# Altium PCB Main.PcbDoc
Units mil, origin at the board's own origin, x right, y up, seen from the top; angles counter-clockwise.
Board outline 6000 x 4000 mil, 2 copper layers (Top Layer, Bottom Layer); 78 components, 93 nets, 345 pads, 12 vias.
Unrouted connection lines stored in the file: 232.
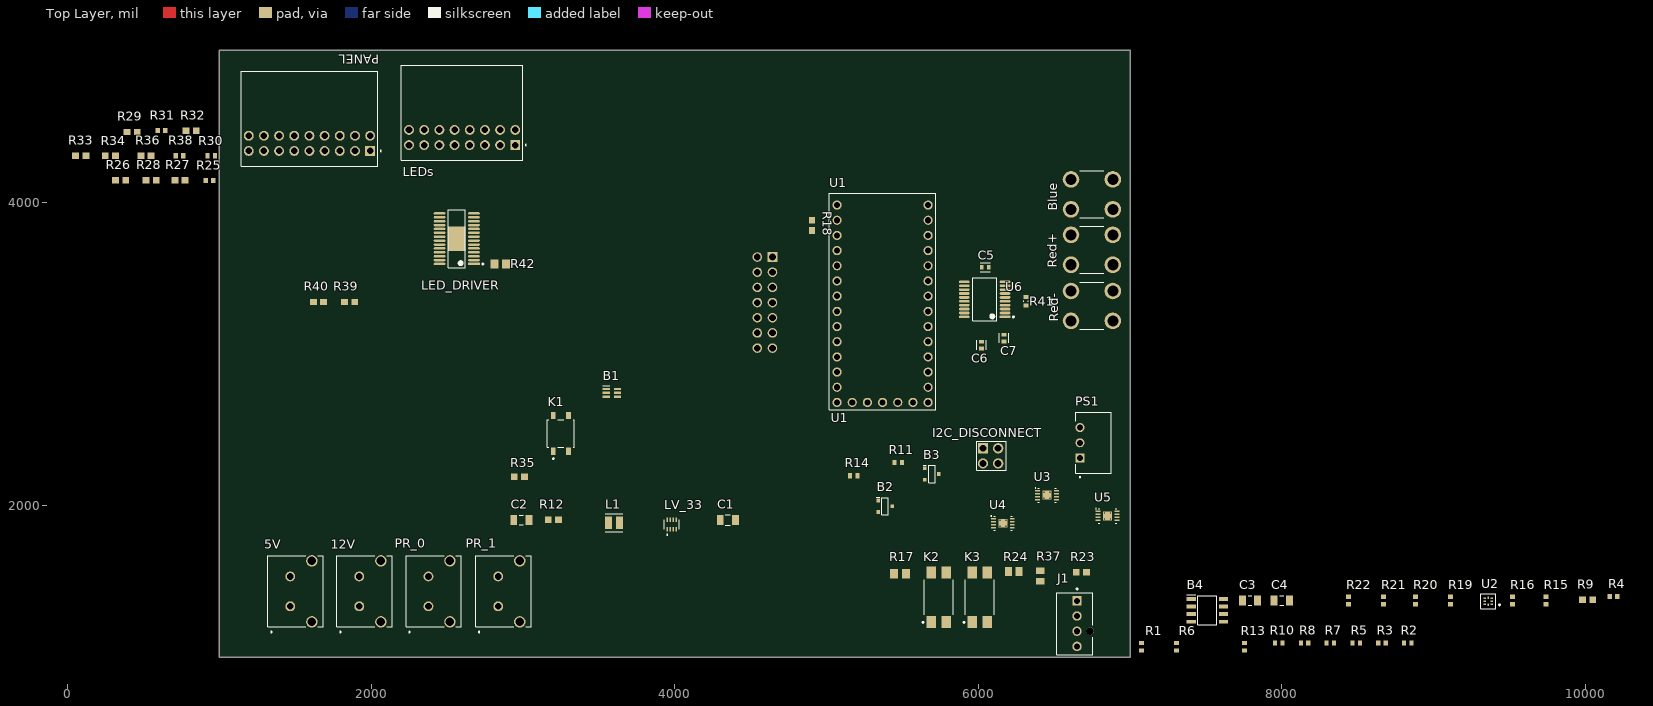
[diagram p0: Top Layer view]
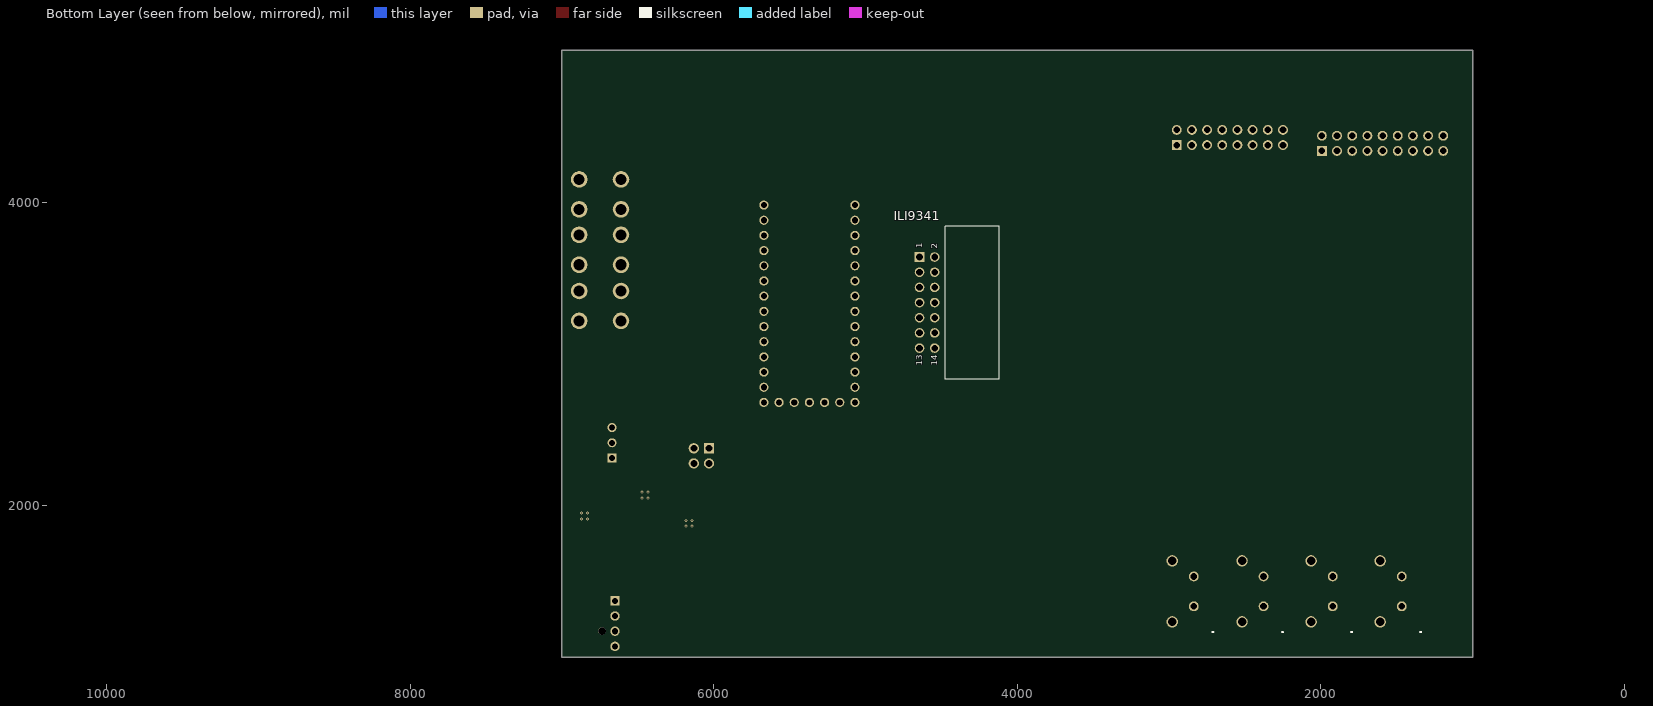
[diagram p1: Bottom Layer view, seen from below]

## Layer stack, top to bottom
Top Solder: solder mask 0.4, Solder Resist, Dk 3.5
Top Layer: signal copper 1.4
Dielectric 1: dielectric 12.6, FR-4, Dk 4.8
Bottom Layer: signal copper 1.4
Bottom Solder: solder mask 0.4, Solder Resist, Dk 3.5

## Board outline
1000,1000 7000,1000 7000,5000 1000,5000

## Design rules (kind name [scope] priority, off if disabled: settings)
BoardOutlineClearance mdCopperDimension [All] p1: gap=10 ignorepadtopadclearanceinfootprint=FALSE except(0: Arc-SplitContinuation Track-SplitContinuation SMDPad-SplitContinuation THPad-SplitContinuation Via-SplitContinuation Fill-SplitContinuation Poly-SplitContinuation Region-SplitContinuation Text-SplitContinuation; 40: Poly-OutlineEdge Poly-CavityEdge Poly-CutoutEdge Poly-SplitBarrior)
Clearance Minimum [InNamedUnion('BMI088') OR InNamedUnion('ICS')] p1: gap=5 ignorepadtopadclearanceinfootprint=FALSE
Clearance Typical [All] p2: gap=14 ignorepadtopadclearanceinfootprint=TRUE except(8: Arc-SMDPad Track-SMDPad SMDPad-SMDPad; 10: Arc-Text Arc-Hole Track-Text Track-Hole SMDPad-Text SMDPad-Hole THPad-Text THPad-Hole Via-Text Via-Hole Fill-Text Fill-Hole Poly-Text Poly-Hole Region-Text Region-Hole Text-Text Text-Hole; 12: Arc-THPad Arc-Via Track-THPad Track-Via SMDPad-THPad SMDPad-Via THPad-THPad THPad-Via)
DiffPairsRouting PumpDiffPairsRouting [InDifferentialPair ('Pump_I2C')] p1: maxlimit=50 minlimit=8 mostfreqgap=16 toplayer_minwidth=8 toplayer_maxwidth=16 toplayer_prefwidth=8 bottomlayer_minwidth=8 bottomlayer_maxwidth=16 bottomlayer_prefwidth=8 maxuncoupledlength=72
DiffPairsRouting BMI088_I2C_DiffPairsRouting [InDifferentialPair ('BMI088_I2C')] p2: maxlimit=50 minlimit=8 mostfreqgap=16 toplayer_minwidth=8 toplayer_maxwidth=16 toplayer_prefwidth=8 bottomlayer_minwidth=8 bottomlayer_maxwidth=16 bottomlayer_prefwidth=8 maxuncoupledlength=72
DiffPairsRouting [All] p3: maxlimit=10 minlimit=10 mostfreqgap=10 toplayer_minwidth=15 toplayer_maxwidth=15 toplayer_prefwidth=15 bottomlayer_minwidth=15 bottomlayer_maxwidth=15 bottomlayer_prefwidth=15 maxuncoupledlength=500
Height [All] p1: minheight=0 maxheight=2500 prefheight=500
HoleSize [All] p1: absolutevalues=TRUE maxlimit=100000 minlimit=10 maxpercent=80.000 minpercent=20.000
HoleToHoleClearance mdDrill [All] p1: gap=10 allowstackedmicrovias=FALSE
MatchedLengths PumpMatchedLengths [InDifferentialPair ('Pump_I2C')] p1: tolerance=72 checknetsindiffpair=TRUE checkdiffpairvsdiffpair=FALSE checkxsignals=FALSE checkothers=FALSE
MatchedLengths BMI088_I2C_MatchedLengths [InDifferentialPair ('BMI088_I2C')] p2: tolerance=16 checknetsindiffpair=FALSE checkdiffpairvsdiffpair=TRUE checkxsignals=TRUE checkothers=TRUE
MinimumAnnularRing MinimumAnnularRing_Component [IsPadHoleValid = True] p1: minimumring=7
MinimumAnnularRing [All] p2: minimumring=5
MinimumSolderMaskSliver [All] p1 off: minsoldermaskwidth=10
PasteMaskExpansion mlMinCreamFrame [All] p1: expansion=6
PlaneClearance [All] p1: clearance=12
PlaneConnect [All] p1: planeconnectstyle=Direct reliefexpansion=20 reliefentries=4 reliefconductorwidth=10 reliefairgap=10
PolygonConnect PolygonConnect_For_PolygonThermal_ON_Width200000_Gap100000 [InPolygonClass('PolygonThermal_ON_Width200000_Gap100000') vs Not IsVia] p1: connectstyle=Relief reliefconductorwidth=20 reliefentries=4 polygonreliefangle="90 Angle" airgapwidth=10
PolygonConnect PolygonConnect_For_PolygonThermal_ON_Width240000_Gap100000 [InPolygonClass('PolygonThermal_ON_Width240000_Gap100000') vs Not IsVia] p2: connectstyle=Relief reliefconductorwidth=24 reliefentries=4 polygonreliefangle="90 Angle" airgapwidth=10
PolygonConnect ThermalVias [IsVia] p3: connectstyle=Direct reliefconductorwidth=10 reliefentries=4 polygonreliefangle="90 Angle" airgapwidth=10
PolygonConnect [All] p4: connectstyle=Direct reliefconductorwidth=10 reliefentries=4 polygonreliefangle="90 Angle" airgapwidth=10
RoutingVias [All] p1: holewidth=16 width=32 viastyle="Through Hole" minholewidth=8 minwidth=18 maxholewidth=96 maxwidth=128
SilkToSilkClearance [All] p1: silktosilkclearance=5
SilkToSolderMaskClearance [IsPad] p1: minsilkscreentomaskgap=4 clearancetoexposedcopper=TRUE
SolderMaskExpansion mlMinStopFrame [All] p1: expansion=7 istentingtop=FALSE
UnRoutedNet [All] p1: checkbadconnections=TRUE
Width [All] p1: maxlimit=105 minlimit=8 preferedwidth=16 minimp=50.000000 maximp=50.000000 favimp=50.000000
19 further rules are at their usual default settings.

## Classes and differential pairs
component class Main: 5V 12V B1 B2 B3 B4 Blue C1 C2 C6 C7 I2C_DISCONNECT ILI9341 J1 K1 K2 K3 L1 LED_DRIVER LEDs LV_33 PANEL PR_0 PR_1 PS1 R1 R2 R3 R4 R5 R6 R7 R8 R9 R10 R11 R12 R13 R14 R15 R16 R17 R18 R19 R20 R21 R22 R23 R24 R25 R26 R27 R28 R29 R30 R31 R32 R33 R34 R35 R36 R37 R38 R39 R41 R42 Red+ Red- U1 U2 U3 U4 U5

## Components (designator, comment, footprint, x,y, rotation, side; value= is the part's Value field where it differs from the comment)
5V "2-1376382-3" CONN_1376382-1_TYCO 1467.51,1336.65 r90 top
12V "1-1376382-2" CONN_1376382-1_TYCO 1922.51,1336.65 r90 top
B1 "74AUP1G11GW,125" SOT65P210X110-6N 3586.54,2742.88 r0 top
B2 "SSM3K357R,LF" SOTFL95P240X88-3N 5386.82,1996.03 r0 top
B3 "SSM3K357R,LF" SOTFL95P240X88-3N 5694.26,2208 r0 top
B4 "ADUM121N1BRZ" SOIC127P600X175-8N 7510,1310 r0 top
Blue "Blue Connector" 8191 6887.03,3951.95 r90 top
C1 "47uF" FP-CL31-IPC_C 4350.43,1906.22 r0 top
C2 "22uF" FP-CL31H-0_2-IPC_C 2990.43,1906.22 r0 top
C3 "22uF" FP-CL31H-0_2-IPC_C 7790,1375 r0 top
C4 "22uF" FP-CL31H-0_2-IPC_C 8000,1375 r0 top
C5 "CL10B104JB8NNNC" FP-CL10-0_1-MFG 6046.15,3570.41 r0 top value=100nF
C6 "CL10B104JB8NNNC" FP-CL10-0_1-MFG 6022.75,3057.16 r270 top value=100nF
C7 "CL10B104JB8NNNC" FP-CL10-0_1-MFG 6168.75,3103.69 r270 top value=100nF
I2C_DISCONNECT "68602-104HLF" HDRV4W67P254_2X2_508X483X858P 6031.43,2277.79 r0 top
ILI9341 "61201421721" 61201421721 4297.88,3337.77 r90 bottom
J1 "47053-1000" FP-47053-1000-MFG 6636.07,1222.64 r90 top
K1 "AQY280SX" FP-AQY210SX-MFG 3250.34,2476.32 r90 top
K2 "AQY212EHA" PNSC-DIP4(SMT)_V 5739.5,1396.21 r90 top
K3 "AQY212EHA" PNSC-DIP4(SMT)_V 6009.5,1396.21 r90 top
L1 "DFE252012P-1R0M=P2" FP-DFE252012C-IPC_C 3600.43,1886.22 r0 top value=1µH
LED_DRIVER "PCA9955BTWJ" FP-SOT1172-3-IPC_A 2564.51,3758.59 r180 top
LEDs "76383-308LF" AMPHENOL_91687-306LF#1 2599.94,4425.24 r180 top
LV_33 "TPS631000DRLR" TPS631000DRLR_TEX 3980.43,1876.22 r90 top
PANEL "76383-309LF" AMPHENOL_91687-306LF#2 1594.11,4386.55 r180 top
PR_0 "1376382-1" CONN_1376382-1_TYCO 2377.51,1336.65 r90 top
PR_1 "1376382-1" CONN_1376382-1_TYCO 2837.51,1336.65 r90 top
PS1 "PXO7805-500-S" CONV_PXO7805-500-S 6670.22,2314.07 r90 top
R1 "ERJ-3EKF3000V" RESC1608X55X30LL15T15 7075,1070 r90 top value=300
R2 "ERJ-3EKF1001V" RESC1608X55X30LL15T15 8830,1095 r0 top value=1k
R3 "ERJ-3EKF1001V" RESC1608X55X30LL15T15 8660,1095 r0 top value=1k
R4 "ERJ-3EKF1001V" RESC1608X55X30LL15T15 10185,1400 r0 top value=1k
R5 "ERJ-3EKF1001V" RESC1608X55X30LL15T15 8490,1095 r0 top value=1k
R6 "ERJ-3EKF1000V" RESC1608X55X30LL15T15 7305,1070 r90 top value=100
R7 "ERJ-3EKF1001V" RESC1608X55X30LL15T15 8320,1095 r0 top value=1k
R8 "ERJ-3EKF1001V" RESC1608X55X30LL15T15 8150,1095 r0 top value=1k
R9 "10k" RESC1609X55X30ML15T15 10015,1380 r0 top
R10 "ERJ-3EKF1001V" RESC1608X55X30LL15T15 7980,1095 r0 top value=1k
R11 "ERJ-3EKF1601V" RESC1608X55X30LL15T15 5472.58,2284.05 r0 top value=1.6k
R12 "10k" RESC1609X55X30ML15T15 3200.43,1906.22 r0 top
R13 "ERJ-3EKF1001V" RESC1608X55X30LL15T15 7755,1070 r90 top value=1k
R14 "ERJ-3EKF1601V" RESC1608X55X30LL15T15 5179.7,2196.67 r0 top value=1.6k
R15 "ERJ-3EKF1001V" RESC1608X55X30LL15T15 9740,1375 r90 top value=1k
R16 "ERJ-3EKF1001V" RESC1608X55X30LL15T15 9520,1375 r90 top value=1k
R17 "2K" RESC2013X70X40ML20T20 5484.5,1551.21 r0 top
R18 "10k" RESC1609X55X30ML15T15 4904.16,3846.54 r270 top
R19 "ERJ-3EKF1001V" RESC1608X55X30LL15T15 9110,1375 r90 top value=1k
R20 "ERJ-3EKF1001V" RESC1608X55X30LL15T15 8880,1375 r90 top value=1k
R21 "ERJ-3EKF1001V" RESC1608X55X30LL15T15 8670,1375 r90 top value=1k
R22 "ERJ-3EKF1001V" RESC1608X55X30LL15T15 8440,1375 r90 top value=1k
R23 "10k" RESC1609X55X30ML15T15 6679.5,1561.21 r0 top
R24 "ERJ-6ENF1500V" RESC2013X70X40NL20T20 6234.5,1566.21 r0 top value=150
R25 "ERJ-3EKF1001V" RESC1608X55X30LL15T15 935.59,4142.99 r0 top value=1k
R26 "10k" RESC1609X55X30ML15T15 350.59,4142.99 r0 top
R27 "10k" RESC1609X55X30ML15T15 740.59,4142.99 r0 top
R28 "10k" RESC1609X55X30ML15T15 550.96,4142.99 r0 top
R29 "10k" RESC1609X55X30ML15T15 426.43,4462.11 r0 top
R30 "ERJ-3EKF1001V" RESC1608X55X30LL15T15 947.5,4304.95 r0 top value=1k
R31 "ERJ-3EKF1001V" RESC1608X55X30LL15T15 619.54,4470.29 r0 top value=1k
R32 "10k" RESC1609X55X30ML15T15 814.54,4470.29 r0 top
R33 "10k" RESC1609X55X30ML15T15 87.5,4304.95 r0 top
R34 "10k" RESC1609X55X30ML15T15 282.5,4304.95 r0 top
R35 "10k" RESC1609X55X30ML15T15 2977.14,2190.7 r0 top
R36 "10k" RESC1609X55X30ML15T15 517.5,4304.95 r0 top
R37 "ERJ-6ENF1500V" RESC2013X70X40NL20T20 6409.5,1536.21 r90 top value=150
R38 "ERJ-3EKF1001V" RESC1608X55X30LL15T15 737.5,4304.95 r0 top value=1k
R39 "10k" RESC1609X55X30ML15T15 1859.14,3341.45 r0 top
R40 "10k" RESC1609X55X30ML15T15 1654.14,3341.45 r0 top
R41 "ERJ-PB3B4300V" RES_ERJ-PB3B4300V 6314.74,3346.07 r90 top value=430
R42 "2K" RESC2013X70X40ML20T20 2851.29,3592.25 r180 top
Red+ "Red Connector" 8191 6887.03,3586.95 r90 top
Red- "Red Connector" 8191 6887.03,3216.95 r90 top
U1 "Teensy 4.0" MODULE_DEV-15583 5370,3330 r0 top
U2 "PCA9570GMH" FP-SOT902-2-MFG 9360,1370 r0 top
U3 "PCT2075TP,147" NXP-SOT1069-2_M 6452.8,2068.63 r0 top
U4 "PCT2075TP,147" NXP-SOT1069-2_M 6162.59,1883.85 r0 top
U5 "PCT2075TP,147" NXP-SOT1069-2_M 6851.82,1932.15 r0 top
U6 "MAX31865AAP+" FP-A20-1-IPC_B 6042.36,3358.87 r180 top

## Footprints (in the part's own frame and the unit in brackets; to place one, negate y for a bottom-side part, rotate by r counter-clockwise, add the part's x,y. Pads: shape width x height; smd on the part's side, far side on the other; paste and mask are expansions set on the pad)
8191 [mm]
  round 2.775 hole 1.85: 1(0,7.01) 1(0,0) 1(5,7.01) 1(5,0)
  silkscreen extent -1.44,1.51 6.44,5.51, body extent -1.45,-0.39 6.45,7.41, height 6.22
61201421721 [mm] "14 pins, right angled, gold plating"
  rect 1.6x1.6 hole 1.1: 1(7.62,8.805)
  round 1.6 hole 1.1: 2(7.62,6.265) 3(5.08,8.805) 4(5.08,6.265) 5(2.54,8.805) 6(2.54,6.265) 7(0,8.805) 8(0,6.265) 9(-2.54,8.805) 10(-2.54,6.265) 11(-5.08,8.805) 12(-5.08,6.265) 13(-7.62,8.805) 14(-7.62,6.265)
  silkscreen extent -12.8,-4.5 12.8,4.5, body extent -12.72,-4.42 12.72,9.13, height 9.23
AMPHENOL_91687-306LF#1 [mm]
  rect 1.65x1.65 hole 1.1: A1(-8.89,1.27)
  round 1.65 hole 1.1: A2(-6.35,1.27) A3(-3.81,1.27) A4(-1.27,1.27) A5(1.27,1.27) A6(3.81,1.27) A7(6.35,1.27) A8(8.89,1.27) B1(-8.89,-1.27) B2(-6.35,-1.27) B3(-3.81,-1.27) B4(-1.27,-1.27) B5(1.27,-1.27) B6(3.81,-1.27) B7(6.35,-1.27) B8(8.89,-1.27)
  silkscreen extent -10.77,-12.07 10.16,3.83, body extent -10.11,-12.02 10.11,1.57, height 7.87
AMPHENOL_91687-306LF#2 [mm]
  rect 1.65x1.65 hole 1.1: A1(-10.16,1.27)
  round 1.65 hole 1.1: A2(-7.62,1.27) A3(-5.08,1.27) A4(-2.54,1.27) A5(0,1.27) A6(2.54,1.27) A7(5.08,1.27) A8(7.62,1.27) A9(10.16,1.27) B1(-10.16,-1.27) B2(-7.62,-1.27) B3(-5.08,-1.27) B4(-2.54,-1.27) B5(0,-1.27) B6(2.54,-1.27) B7(5.08,-1.27) B8(7.62,-1.27) B9(10.16,-1.27)
  silkscreen extent -12.04,-12.07 11.43,3.83, body extent -11.38,-12.02 11.38,1.57, height 7.87
CONN_1376382-1_TYCO [mil]
  round 65 hole 45: 1(0,0) 2(196.85,0)
  round 75 hole 55: 3(-102.57,-142) 4(299.43,-142)
  silkscreen extent -175,-217 332,147, body extent -130,-205 327,173, height 555
CONV_PXO7805-500-S [mm]
  rect 1.508x1.508 hole 1: 1(0,0)
  round 1.508 hole 1: 2(2.54,0) 3(5.08,0)
  silkscreen extent -3.31,-5.26 7.68,0.74, body extent -2.6,-4.24 7.68,0.75, height 8.61
FP-47053-1000-MFG [mm]
  rect 1.57x1.57 hole 1.02 paste-1000 mask+0: 1(3.81,-0.38)
  round 1.57 hole 1.02 paste-1000 mask+0: 2(1.27,-0.38) 3(-1.27,-0.38) 4(-3.81,-0.38)
  round 1.25 hole 1.25 unplated paste-1000 mask+0: ""(-1.27,-2.54)
  silkscreen extent -5.2,-3.02 5.92,3.02, body extent -5.3,-3.26 5.3,3.12, height 0.25
FP-A20-1-IPC_B [mm]
  rect 1.782x0.458 smd paste+0 mask+0: 1(-3.414,2.925)
  rrect100% 1.782x0.458 smd paste+0 mask+0: 2(-3.414,2.275) 3(-3.414,1.625) 4(-3.414,0.975) 5(-3.414,0.325) 6(-3.414,-0.325) 7(-3.414,-0.975) 8(-3.414,-1.625) 9(-3.414,-2.275) 10(-3.414,-2.925) 11(3.414,-2.925) 12(3.414,-2.275) 13(3.414,-1.625) 14(3.414,-0.975) 15(3.414,-0.325) 16(3.414,0.325) 17(3.414,0.975) 18(3.414,1.625) 19(3.414,2.275) 20(3.414,2.925)
  silkscreen extent -4.93,-3.6 2.02,3.6, body extent -4.55,-3.85 4.55,3.85, height 0.25
FP-AQY210SX-MFG [mm]
  rect 1.2x0.8 smd paste+0 mask+0: 1(-3,1.27) 2(-3,-1.27) 3(3,-1.27) 4(3,1.27)
  silkscreen extent -4.37,-2.25 2.3,2.25, body extent -3.7,-2.35 3.7,2.35, height 0.25
FP-CL10-0_1-MFG [mm]
  rect 0.625x0.825 smd paste+0 mask+0: 1(-0.575,0) 2(0.575,0)
  silkscreen extent -0.8,-0.79 0.8,0.79, body extent -0.99,-0.55 0.99,0.55, height 0.25
FP-CL31-IPC_C [mil]
  rect 43.52x65.28 smd paste+0 mask+0: 1(-50.25,0) 2(50.25,0)
  silkscreen extent -17,-34 17,34, body extent -76,-38 76,38, height 10
FP-CL31H-0_2-IPC_C [mil]
  rect 45.45x67.17 smd paste+0 mask+0: 1(-50.23,0) 2(50.23,0)
  silkscreen extent -13,-31 13,31, body extent -77,-39 77,39, height 10
FP-DFE252012C-IPC_C [mil]
  rect 45.47x82.92 smd paste+0 mask+0: 1(-36.44,0) 2(36.44,0)
  silkscreen extent -59,-59 59,59, body extent -63,-47 63,47, height 10
FP-SOT902-2-MFG [mm]
  rect 0.45x0.27 smd paste-1000 mask-1000: 1(0.6,-0.5)
  rect 0.45x0.27 smd paste-1000 mask+0: 2(0.6,0) 3(0.6,0.5) 5(-0.6,0.5) 6(-0.6,0) 7(-0.6,-0.5)
  rect 0.27x0.45 smd paste-1000 mask+0: 4(0,0.6) 8(0,-0.6)
  silkscreen extent -1.28,-1.28 2.02,1.28, body extent -0.95,-0.95 0.95,0.95, height 0.25
FP-SOT1172-3-IPC_A [mm]
  rect 1.955x0.421 smd paste+0 mask+0: 1(-2.875,4.225)
  rrect100% 1.955x0.421 smd paste+0 mask+0: 2(-2.875,3.575) 3(-2.875,2.925) 4(-2.875,2.275) 5(-2.875,1.625) 6(-2.875,0.975) 7(-2.875,0.325) 8(-2.875,-0.325) 9(-2.875,-0.975) 10(-2.875,-1.625) 11(-2.875,-2.275) 12(-2.875,-2.925) 13(-2.875,-3.575) 14(-2.875,-4.225) 15(2.875,-4.225) 16(2.875,-3.575) 17(2.875,-2.925) 18(2.875,-2.275) 19(2.875,-1.625) 20(2.875,-0.975) 21(2.875,-0.325) 22(2.875,0.325) 23(2.875,0.975) 24(2.875,1.625) 25(2.875,2.275) 26(2.875,2.925) 27(2.875,3.575) 28(2.875,4.225)
  rect 3x4.1 smd paste-1000 mask+0: 29(0,0)
  silkscreen extent -4.48,-4.85 1.4,4.85, body extent -4.35,-5.35 4.35,5.35, height 0.25
HDRV4W67P254_2X2_508X483X858P [mm]
  rect 1.725x1.725 / inner round 1.725 / far side rect 1.725x1.725 hole 1.15: 1(0,2.54)
  round 1.725 hole 1.15: 2(2.54,2.54) 3(0,0) 4(2.54,0)
  silkscreen extent -1.07,-1.14 3.91,3.68, body extent -1.07,-1.14 3.91,3.68, height 8.38
MODULE_DEV-15583 [mm]
  round 1.53 hole 1.02: 0(-7.62,13.97) 1(-7.62,11.43) 2(-7.62,8.89) 3(-7.62,6.35) 3.3V(-2.54,-16.51) 3.3V(7.62,11.43) 4(-7.62,3.81) 5(-7.62,1.27) 6(-7.62,-1.27) 7(-7.62,-3.81) 8(-7.62,-6.35) 9(-7.62,-8.89) 10(-7.62,-11.43) 11(-7.62,-13.97) 12(-7.62,-16.51) 13(7.62,-16.51) 14(7.62,-13.97) 15(7.62,-11.43) 16(7.62,-8.89) 17(7.62,-6.35) 18(7.62,-3.81) 19(7.62,-1.27) 20(7.62,1.27) 21(7.62,3.81) 22(7.62,6.35) 23(7.62,8.89) GND(-7.62,16.51) GND(0,-16.51) GND(7.62,13.97) ON-OFF(5.08,-16.51) PGM(2.54,-16.51) VBAT(-5.08,-16.51) VIN(7.62,16.51)
  silkscreen extent -8.89,-17.78 8.89,18.48, body extent -8.89,-17.78 8.89,18.48, height 4.38
NXP-SOT1069-2_M [mm] "PSON, 8-Leads, Body 2.1x3.1mm, Pitch 0.5mm, Thermal Pad 1.5x1.5mm, IPC Low Density"
  rect 0.79x0.26 smd mask+0: 1(-1.585,0.75) 2(-1.585,0.25) 3(-1.585,-0.25) 4(-1.585,-0.75) 5(1.585,-0.75) 6(1.585,-0.25) 7(1.585,0.25) 8(1.585,0.75)
  rect 1.5x1.5 smd mask+0: 9(0,0)
  silkscreen extent -2,-1.2 1.55,1.25, body extent -1.55,-1.05 1.55,1.05, height 0.8
PNSC-DIP4(SMT)_V [mm] "DIP(SMT), 4-Leads, Body 6.4x4.78mm, Pitch 2.54mm"
  rect 2x1.6 smd: 1(-4.15,1.27) 2(-4.15,-1.27) 3(4.15,-1.27) 4(4.15,1.27)
  silkscreen extent -4.31,-2.42 2.95,2.74, body extent -3.22,-2.41 3.22,2.41, height 3
RES_ERJ-PB3B4300V [mm]
  rect 0.65x0.9 smd: 1(-0.725,0) 2(0.725,0)
  silkscreen extent -0.08,-0.4 0.08,0.4, body extent -0.8,-0.4 0.8,0.4, height 0.45
RESC1608X55X30LL15T15 [mm] "Chip Resistor, 2-Leads, Body 1.60x0.80mm, IPC High Density"
  rect 0.7x0.85 smd: 1(-0.625,0) 2(0.625,0)
  body extent -0.87,-0.48 0.87,0.48, height 0.55
RESC1609X55X30ML15T15 [mm] "Chip Resistor, 2-Leads, Body 1.75x0.95mm, IPC Low Density"
  rect 1.15x1.05 smd: 1(-0.85,0) 2(0.85,0)
  body extent -0.87,-0.48 0.87,0.48, height 0.55
RESC2013X70X40ML20T20 [mm] "Chip Resistor, 2-Leads, Body 2.00x1.25mm, IPC Low Density"
  rect 1.35x1.55 smd: 1(-0.975,0) 2(0.975,0)
  body extent -1.1,-0.72 1.1,0.72, height 0.7
RESC2013X70X40NL20T20 [mm] "Chip Resistor, 2-Leads, Body 2.00x1.25mm, IPC Medium Density"
  rect 1.15x1.45 smd: 1(-0.875,0) 2(0.875,0)
  body extent -1.1,-0.72 1.1,0.72, height 0.7
SOIC127P600X175-8N [mm]
  rect 1.525x0.65 smd: 1(-2.712,1.905) 2(-2.712,0.635) 3(-2.712,-0.635) 4(-2.712,-1.905) 5(2.712,-1.905) 6(2.712,-0.635) 7(2.712,0.635) 8(2.712,1.905)
  silkscreen extent -3.47,-2.45 1.6,2.58, body extent -3,-2.45 3,2.45, height 1.75
SOT65P210X110-6N [mm]
  rect 1.2x0.4 smd: 1(-0.95,0.65) 2(-0.95,0) 3(-0.95,-0.65) 4(0.95,-0.65) 5(0.95,0) 6(0.95,0.65)
  silkscreen extent -1.55,1.2 -0.35,1.2, body extent -1.05,-1 1.05,1, height 1.1
SOTFL95P240X88-3N [mm]
  rect 0.575x0.62 smd: 1(-1.188,0.95) 2(-1.188,-0.95) 3(1.188,0)
  silkscreen extent -1.48,-1.45 0.55,1.51, body extent -1.2,-1.45 1.2,1.45, height 0.88
TPS631000DRLR_TEX [mil]
  rect 28x9 smd paste+0 mask+0: 1(-31.5,29.53) 2(-31.5,9.84) 3(-31.5,-9.84) 4(-31.5,-29.53) 5(31.5,-29.53) 6(31.5,-9.84) 7(31.5,9.84) 8(31.5,29.53)
  silkscreen extent -71,-48 31,48, body extent -34,-44 34,44, height 27

## Part data
5V: library part CMP-002-00095-1, "Conn Power HDR 2Power POS 5mm Press Fit ST Thru-Hole 2 Terminal 1 Port Bag", Color=Blue, Contact Current Rating=10A, Flammability Rating="UL94 V-0", Manufacturer_Part_Number=1376382-1, Max Operating Temperature=221°C, Max Voltage Rating (AC)=300V, Mfr_Name="TE Connectivity", Min Operating Temperature=-40°C, Number of Power Positions=2, Package Quantity=100, Approvals=CSA, Circuit Application=Power, Connector System=Wire-to-Board, Connector Type=Pin, Contact Finish - Mating=TIN, Contact Gender=Male, Contact Material="Copper Alloy", Contact Mating Length=0.248inch, Contact Plating=Tin, Contact Retention="No (Without)", Contact Shape=Rectangular, Contact Type=Tab, Copyright="Copyright (C) 2023 Ultra Librarian. All rights reserved.", Current Rating=10A, Design Item ID=1376382-1, ELV=Compliant, Fastening Type=Ramp, Gender=Male, Height=0.55inch, Housing Color=Blue, Housing Material=Nylon, Insulation Color=Blue, Insulation Material=Nylon, Lead Free="Lead Free", Length=11.6mm, Mated Stacking Heights=19.4mm, Material=Nylon, Mating Alignment="No (Without)", Mating Retention="Yes (With)", Mounting Technology="Through Hole", Number of Contacts=2, Number of Ports=1, Number of Positions=2, Number of Rows=1, Number of Terminals/Pins=2, Orientation=Straight, Packaging=Bag, PCB Mount Alignment="No (Without)", PCB Mount Retention=With, PCB Mounting Orientation=Vertical, PCB Thickness=0.063mm, Pitch=5mm, Plating Thickness=39.36um, Radiation Hardening=No, RefDes=RefDes, RoHS Compliant=Yes, Sealable="No (Without)", Selectively Loaded="No (Without)", Series="Power Key", Source=1376382-1.SchLib, Termination=Press-Fit, Type=DEV, Voltage Rating=300V, Voltage Rating (AC)=300V, Width=0.555inch
12V: library part CMP-002-00094-1, "Conn Power RCP 2 POS 5mm Solder ST Thru-Hole 2 Terminal 1 Port Loose Piece/Bulk", Color=Red, Contact Current Rating=10A, Flammability Rating="UL94 V-0", Manufacturer_Part_Number=1376382-1, Max Operating Temperature=221°C, Max Voltage Rating (AC)=300V, Mfr_Name="TE Connectivity", Min Operating Temperature=-40°C, Number of Power Positions=2, Package Quantity=100, Approvals=CSA, Circuit Application=Power, Connector System=Wire-to-Board, Connector Type=Pin, Contact Finish - Mating=TIN, Contact Gender=Male, Contact Material="Copper Alloy", Contact Mating Length=0.248inch, Contact Plating=Tin, Contact Retention="No (Without)", Contact Shape=Rectangular, Contact Type=Tab, Copyright="Copyright (C) 2023 Ultra Librarian. All rights reserved.", Current Rating=10A, Design Item ID=1376382-1, ELV=Compliant, Fastening Type=Ramp, Gender=Male, Height=0.55inch, Housing Color=Red, Housing Material=Nylon, Insulation Color=Red, Insulation Material=Nylon, Lead Free="Lead Free", Length=11.6mm, Mated Stacking Heights=19.4mm, Material=Nylon, Mating Alignment="No (Without)", Mating Retention="Yes (With)", Mounting Technology="Through Hole", Number of Contacts=2, Number of Ports=1, Number of Positions=2, Number of Rows=1, Number of Terminals/Pins=2, Orientation=Straight, Packaging=Bag, PCB Mount Alignment="No (Without)", PCB Mount Retention=With, PCB Mounting Orientation=Vertical, PCB Thickness=0.063mm, Pitch=5mm, Plating Thickness=39.36um, Radiation Hardening=No, RefDes=RefDes, RoHS Compliant=Yes, Sealable="No (Without)", Selectively Loaded="No (Without)", Series="Power Key", Source=1376382-1.SchLib, Termination=Press-Fit, Type=DEV, Voltage Rating=300V, Voltage Rating (AC)=300V, Width=0.555inch
B1: library part CMP-518-000000-3, "IC GATE AND 1CH 3-INP 6-TSSOP", Design Item ID=74AUP1G11GW,125, RoHS Compliant=Yes, Source=74AUP1G11GW,125.SchLib
B2 B3: library part CMP-532-000000-3, "Trans MOSFET N-CH Si 60V 0.65A Automotive 3-Pin SOT-23F T/R", Design Item ID=SSM3K357R,LF, Source=SSM3K357R,LF.SchLib
B4: library part CMP-546-000000-2, "Digital Isolator CMOS 2-CH 150Mbps 8-Pin SOIC N Tube", Case/Package=SOIC, Isolated Power=No, Manufacturer_Name="Analog Devices", Max Operating Temperature=125°C, Max Supply Voltage=5.5V, Min Operating Temperature=-40°C, Min Supply Voltage=4.5V, Mouser Part Number=584-ADUM121N1BRZ, Channel Type=Unidirectional, Data Rate=150Mbps, Datasheet Link=http://www.analog.com/media/en/technical-documentation/data-sheets/ADuM120N_121N.pdf, Design Item ID=ADUM121N1BRZ, Geometry.Height=1.75mm, Lead Free="Contains Lead", Manufacturer_Part_Number=ADUM121N1BRZ, Mouser Price/Stock=https://www.mouser.co.uk/ProductDetail/Analog-Devices/ADUM121N1BRZ?qs=lrf6x%2Foh5fBVNc%2Fo3CLfcQ%3D%3D, Number of Channels=2, Packaging=Rail/Tube, Pins=8, Propagation Delay=13ns, Pulse Width Distortion (PWD)=3ns, Reach SVHC Compliant=Yes, RoHS Compliant=Yes, Series=iCoupler®, Source=ADUM121N1BRZ.SchLib, Type="General Purpose"
Blue Red+ Red-: library part CMP-500-000000-3, "TERM SCREW 6-32 4 PIN PCB", Color=Silver, Current Rating=15A, Manufacturer_Name="Keystone Electronics", Manufacturer_Part_Number=8191, Mouser Part Number=534-8191, Package Quantity=100, Body Material=Brass, Body Plating=Tin, Connector Type="PCB,Terminal Block", Contact Material=Brass, Contact Plating=Tin, Datasheet Link=http://www.keyelco.com/product-pdf.cfm?p=1517, Depth=7.87mm, Design Item ID=8191, Diameter=0.31inch, Gender=Male, Geometry.Height=6.56mm, Height=0.44inch, Insulation=Non-Insulated, Lead Free="Lead Free", Length=0.21inch, Material=Brass,Tin, Max Current Rating=15A, Mounting Technology="Through Hole", Mouser Price/Stock=https://www.mouser.co.uk/ProductDetail/Keystone-Electronics/8191?qs=lQmX4aIt5iAMQ8PQTpZ%2Fwg%3D%3D, Number of Contacts=4, Number of Ports=1, Number of Rows=2, Number of Terminals/Pins=4, Orientation=Straight, Packaging=Bulk, Pins=4, Reach SVHC Compliant=Yes, RoHS Compliant=Yes, Series=-, Source=8191.SchLib, Terminal Material=Brass, Termination=Screw, Width=0.02inch, Wire/Cable Gauge=22AWG
C1: library part CMP-001-00091-1, "Cap Ceramic 47uF 10V X5R 20% SMD 1206 85°C Embossed Plastic T/R"
C2 C3 C4: library part CMP-001-00087-1, "Ceramic capacitor SMD 1206 - 22uF/25V X5R# K +-10% Samsung, RoHS"
C5 C6 C7: library part CMP-13271-000011-1, "CAP CER 0.1UF 50V X7R 0603", Capacitance=100nF, Manufacturer="Samsung Electro-Mechanics America, Inc", Package=CL10-0.1, Temperature="-55°C to +125°C", Temperature Characteristic=X7R, Temperature Coefficient=15%, Temperature Range High=+125°C, Temperature Range Low=-55°C, Tolerance=5%, Voltage Rating=50V, Automotive=No, Category=Cap, ComponentLink2Description=Datasheet, ComponentLink2URL=http://www.samsungsem.com/kr/support/product-search/mlcc/__icsFiles/afieldfile/2019/06/18/CL10B104JB8NNNC-19.pdf, Device Class L1="Passive Components", Device Class L2=Capacitors, Device Class L3="Ceramic Capacitors", Digikey Description="CAP CER 0.1UF 50V X7R 0603", Height=0.9mm, Ipc Land Pattern Name=CAPC16080X80, Lead Free=Yes, Manufacturer Part Number=CL10B104JB8NNNC, Material=Ceramic, Octopart=https://octopart.com/cl10b104jb8nnnc-samsung-9302151, RoHS=TRUE
I2C_DISCONNECT: library part CMP-002-00096-3, "Conn Unshrouded Header HDR 4 POS 2.54mm Solder ST Top Entry Thru-Hole BergStik® Bulk", Color=Black, Current Rating=3A, Flammability Rating="UL94 V-0", Insulation Resistance=5GR, Manufacturer_Name="Amphenol Communication Solutions", Max Operating Temperature=125°C, Min Operating Temperature=-65°C, Mouser Part Number=649-68602-104HLF, Package Quantity=100, Voltage Rating=1.5kV, Connector Type="Male Pin", Contact Gender=Male, Contact Material=Bronze, Contact Mating Length=0.23inch, Contact Plating=Gold,GXT, Contact Post Length=3.81mm, Contact Type="Male Pin", Datasheet Link=https://cdn.amphenol-cs.com/media/wysiwyg/files/drawing/67996.pdf, Design Item ID=68602-104HLF, Gender=Male, Geometry.Height=8.58mm, Housing Material=Thermoplastic, Manufacturer_Part_Number=68602-104HLF, Mounting Technology="Through Hole", Mouser Price/Stock=https://www.mouser.com/Search/Refine.aspx?Keyword=649-68602-104HLF, Number of Contacts=4, Number of Positions=4, Number of Rows=2, Packaging=Bulk, Pitch=2.54mm, Radiation Hardening=No, RoHS Compliant=Yes, Row Spacing=0.1inch, Series="BERGSTIK® II, MezzSelect™, Basics+", Source=68602-104HLF.SchLib, Termination=Solder
ILI9341: library part CMP-002-00088-1, "Male Box Header WR-BHD, THT, Angled, pitch 2.54 mm, 14 pins", Color=Black, Flammability Rating="UL94 V-0", Max Operating Temperature=125°C, Min Operating Temperature=-40°C, Voltage Rating=250V, Connector Type=Header, Contact Finish - Mating=GOLD, Contact Material="Copper Alloy,Copper", Contact Plating=Gold, Contact Shape=Square, Contact Type="Male Pin", Fastening Type=Pull, Gender=Male, Insulation Color=Black, Insulation Material=PBT, Mounting Technology="Through Hole", Number of Contacts=14, Number of Positions=14, Number of Rows=2, Packaging=Tray, Pitch=0.1inch, RoHS Compliant=Yes, Row Spacing=0.1inch, Series=WR-BHD, Termination=Solder
J1: library part CMP-002-00097-2, "CONN HEADER VERT 4POS 2.54MM", Current Rating=4A, Housing Color=Beige, Max Operating Temperature=75°C, Min Operating Temperature=0°C, Package Quantity=12000, Voltage Rating=250V, Contact Material=Brass,Copper, Contact Plating=Tin, Depth=5.84mm, Gender=Male, Glow Wire Compliant=Non-compliant, Halogen Free="Low Halogen", Housing Material=Nylon, Length=10.2mm, Mounting Technology="Through Hole", Number of Circuits=4, Number of Contacts=4, Number of Positions=4, Number of Rows=1, Orientation=Vertical, Packaging=Bulk, Pitch=2.54mm, Radiation Hardening=No, Series=47053, Termination="Through Hole", Voltage Rating (DC)=250V
K1: library part CMP-00026-00004-1, "AQY Photomos Series 120 mA 350 V 25 Ohm SMT 1 Channel Solid State Relay -SOP-4", Case/Package=SOP, Forward Current=900uA, Input Current=50mA, Isolation Voltage=1.5kV, Load Current=120mA, Max Operating Temperature=85°C, Max Output Voltage=350V, Max Power Dissipation=350mW, Max Supply Voltage=1.5V, Min Operating Temperature=-40°C, On-State Resistance=25R, Package Quantity=1000, Height=2.1mm, Input Type=DC, Isolation Voltage-Max=1.5kV, Lead Free="Lead Free", Length=4.4mm, Max Input Current=50mA, Max Output current=120mA, Mounting Technology="Surface Mount", On-state Resistance-Max=25R, Output Current=120mA, Output Voltage=350V, Packaging="Tape and Reel", Pins=4, Radiation Hardening=No, Relay Type=Relay, Rise Time=230us, RoHS Compliant=Yes, Series="PhotoMOS™ AQY", Termination="Gull Wing", Throw Configuration=SPST,DPST, Width=4.3mm
K2 K3: library part CMP-00026-00005-1, "Relay SSR 50mA 1.5V DC-IN 0.55A 60V AC/DC-OUT 4-Pin DIP SMD Tube", Case/Package=SMD/SMT, Contact Resistance=850mR, Current Rating=550mA, Forward Current=1.2mA, Input Current=50mA, Isolation Voltage=5kV, Max Operating Temperature=85°C, Max Output Voltage=60V, Max Power Dissipation=550mW, Min Operating Temperature=-40°C, On-State Resistance=2.5R, Package Quantity=100, Height=2.9mm, Input Type=DC, Isolation Voltage-Max=5kV, Lead Free="Lead Free", Length=6.4mm, Load Current=550mA, Max Input Current=50mA, Max Output current=550mA, On-state Resistance-Max=2.5R, Output Current=550mA, Output Voltage=60V, Packaging=Rail/Tube, Pins=4, Radiation Hardening=No, Relay Type=Relay, RoHS Compliant=Yes, Series="PhotoMOS™ AQY", Termination="Gull Wing", Test Voltage=5kV, Throw Configuration=SPST, Width=4.78mm
L1: library part CMP-006-00030-1, "Inductor Power Shielded Wirewound 1uH 20% 1MHz Metal 3.2A 0.042Ohm DCR 1008 T/R", Case Code (Imperial)=1008, Case Code (Metric)=2520, Current Rating=4.3A, DC Resistance (DCR)=42mR, Max DC Current=3.2A, Max Operating Temperature=125°C, Min Operating Temperature=-40°C, Resistor Type="Wirewound,Metal Alloy", Test Frequency=1MHz, Tolerance=20%, Case/Package=1008, Core Material=Ferrite, Depth=2mm, Height - Seated (Max)=0.039inch, Length=0.098inch, Mounting Technology="Surface Mount", Packaging="Cut Tape", RoHS Compliant=Yes, Series=DFE252012P, Shielding=Shielded, Width=0.079inch
LED_DRIVER: library part CMP-00024-00006-1, "LED DRVR Boost 16-CH Individual RGB PWM 20V 0.03A 28-Pin HTSSOP T/R", Case/Package=HTSSOP, Max Operating Temperature=85°C, Max Output current=30mA, Max Output Voltage=20V, Max Supply Voltage=5.5V, Min Input Voltage=3V, Min Operating Temperature=-40°C, Min Output Voltage=800mV, Output Current per Channel=65mA, Contact Plating=Gold,Silver, Lead Free="Lead Free", Mounting Technology="Surface Mount", Number of Channels=16, Number of Outputs=16, Packaging="Cut Tape", Pins=28, RoHS Compliant=Yes, Series=-, Topology=Boost
LEDs: library part CMP-002-00093-1, "Dubox®2.54mm, Board to Board Connector, Shrouded Header, Double Row, Right Angle.", Color=Blue, Current Rating=3A, Insulation Resistance=100GR, Max Operating Temperature=125°C, Max Voltage Rating (AC)=1kV, Min Operating Temperature=-40°C, Package=None, Package Quantity=26, Availability=Unavailable, Connector Type="Male Pin", Contact Material=Bronze,Nickel,Gold, Contact Mating Length=0.197inch, Contact Plating=Gold,GXT, Contact Post Length=3.35mm, Contact Type="Male Pin", Depth=13.28mm, Design Item ID=91687-306LF, Fastening Type=Friction, Gender=Male, Housing Color=Blue, Housing Material=Polyester, Lead Free="Lead Free", Length=20.14mm, MF="{'manufacturer': u'Amphenol ICC (FCI)'}", Mounting Technology="Through Hole", MP=91687-306LF, Number of Contacts=16, Number of Positions=16, Number of Rows=2, Orientation="Right Angle", Packaging=Rail/Tube, Pitch=2.54mm, Price=None, Radiation Hardening=No, RoHS Compliant=Yes, Row Spacing=0.1inch, Series="DUBOX™, MezzSelect™, Basics+", Source=91687-306LF.SchLib, Termination=Solder, Voltage Rating=1kV, Width=9.34mm
LV_33: library part CMP-512-000000-2, "1.5-A output current, high power density buck-boost converter 8-SOT-5X3 -40 to 125", Mfr_Name="Texas Instruments", Copyright="Copyright (C) 2023 Ultra Librarian. All rights reserved.", Design Item ID=TPS631000DRLR, Manufacturer_Part_Number=TPS631000DRLR, RefDes=RefDes, Source=TPS631000DRLR.SchLib, Type=DEV
PANEL: library part CMP-002-00091-2, "Dubox®2.54mm, Board to Board Connector, Shrouded Header, Double Row, Right Angle.", Color=Blue, Current Rating=3A, Insulation Resistance=100GR, Max Operating Temperature=125°C, Max Voltage Rating (AC)=1kV, Min Operating Temperature=-40°C, Package=None, Package Quantity=23, Availability=Unavailable, Connector Type="Male Pin", Contact Material=Bronze,Nickel,Gold, Contact Mating Length=0.197inch, Contact Plating=Gold,GXT, Contact Post Length=3.35mm, Contact Type="Male Pin", Depth=13.28mm, Design Item ID=91687-306LF, Fastening Type=Friction, Gender=Male, Housing Color=Blue, Housing Material=Polyester, Lead Free="Lead Free", Length=22.68mm, MF="{'manufacturer': u'Amphenol ICC (FCI)'}", Mounting Technology="Through Hole", MP=91687-306LF, Number of Contacts=18, Number of Positions=18, Number of Rows=2, Orientation="Right Angle", Packaging=Rail/Tube, Pitch=2.54mm, Price=None, Radiation Hardening=No, RoHS Compliant=Yes, Row Spacing=0.1inch, Series="DUBOX™, MezzSelect™, Basics+", Source=91687-306LF.SchLib, Termination=Solder, Voltage Rating=1kV, Width=9.34mm
PR_0 PR_1: library part CMP-521-000000-3, "CONN HEADER 2POS 5MM NATURAL TIN", Color=Natural, Contact Current Rating=10A, Flammability Rating="UL94 V-0", Max Operating Temperature=221°C, Max Voltage Rating (AC)=300V, Mfr_Name="TE Connectivity", Min Operating Temperature=-40°C, Number of Power Positions=2, Package Quantity=100, Approvals=CSA, Circuit Application=Power, Connector System=Wire-to-Board, Connector Type=Pin, Contact Gender=Male, Contact Material="Copper Alloy", Contact Mating Length=0.248inch, Contact Plating=Tin, Contact Retention="No (Without)", Contact Type="Male Pin", Copyright="Copyright (C) 2023 Ultra Librarian. All rights reserved.", Current Rating=10A, Design Item ID=1376382-1, Fastening Type=Ramp, Height=0.55inch, Housing Material=Nylon, Length=11.6mm, Manufacturer_Part_Number=1376382-1, Mating Alignment="No (Without)", Mating Retention="Yes (With)", Mounting Technology="Through Hole", Number of Contacts=2, Number of Ports=1, Number of Positions=2, Number of Rows=1, Number of Terminals/Pins=2, Orientation=Straight, Packaging=Bag, PCB Mount Alignment="No (Without)", PCB Mount Retention=With, PCB Mounting Orientation=Vertical, PCB Thickness=0.063mm, Pitch=5mm, Plating Thickness=39.36um, Radiation Hardening=No, RefDes=RefDes, RoHS Compliant=Yes, Sealable="No (Without)", Selectively Loaded="No (Without)", Series="Power Key", Source=1376382-1.SchLib, Termination=Press-Fit, Type=DEV, Voltage Rating=300V, Width=0.555inch
PS1: library part CMP-543-000000-3, "Dc-dc Non-isolated, 0.5 A, 6.5~36 VDC Input, 5 VDC Output, Sip", Package=None, Availability=Unavailable, Design Item ID=PXO7805-500-S, MF="{'manufacturer': u'CUI'}", MP=PXO7805-500-S, Price=None, Source=PXO7805-500-S.SchLib
R1: library part CMP-009-00229-1, "RES SMD 300 OHM 1% 1/10W 0603", Case Code (Imperial)=0603, Case Code (Metric)=1608, Max Operating Temperature=155°C, Max Power Dissipation=100mW, Min Operating Temperature=-55°C, Package Quantity=1, Resistance Tolerance=1%, Resistor Type="Thick Film", Temperature Coefficient=100ppm/°C, Voltage Rating=75V, Case/Package=0603, Construction=Rectangular, Contact Plating=Tin, Depth=0.8mm, Features="Automotive AEC-Q200", Height=0.022inch, Lead Free="Lead Free", Length=1.6mm, Military Standard=Not, Mounting Technology="Surface Mount", Number of Terminations=2, Packaging="Tape and Reel", Power Rating=100mW, Radiation Hardening=No, Reach SVHC Compliant=Yes, RoHS Compliant=Yes, Series=ERJ, Termination=SMD/SMT, Tolerance=1%, Voltage Rating (DC)=75V, Width=0.8mm
R2 R3 R4 R5 R7 R8 R10 R13 R15 R16 R19 R20 R21 R22 R25 R30 R31 R38: library part CMP-009-00014-6, "Chip Resistor, 1 KOhm, +/-1%, 0.1 W, -55 to 155 degC, 0603 (1608 Metric)", Case/Package=0603, Max Operating Temperature=155°C, Min Operating Temperature=-55°C, Power=100mW, Tolerance=1%, Voltage Rating=75V, Mounting Technology="Surface Mount", Pins=2, RoHS Compliant=Yes
R6: library part CMP-009-00230-1, "Res Thick Film 0603 100 Ohm 1% 1/10W ±100ppm/°C Molded SMD Punched Carrier T/R", Case Code (Imperial)=0603, Case Code (Metric)=1608, Max Operating Temperature=155°C, Max Power Dissipation=100mW, Min Operating Temperature=-55°C, Package Quantity=5000, Resistance Tolerance=1%, Resistor Type="Thick Film", Temperature Coefficient=100ppm/°C, Voltage Rating=75V, Case/Package=0603, Construction=Rectangular, Contact Plating=Tin, Depth=0.8mm, Features="Automotive AEC-Q200", Height=0.45mm, Lead Free="Lead Free", Length=1.6mm, Military Standard=Not, Mounting Technology="Surface Mount", Number of Terminations=2, Packaging="Tape and Reel", Pins=2, Power Rating=100mW, Radiation Hardening=No, Reach SVHC Compliant=Yes, RoHS Compliant=Yes, Series=ERJ, Termination=SMD/SMT, Tolerance=1%, Voltage Rating (DC)=75V, Weight=7.1E-05oz, Width=0.8mm
R9 R12 R18 R23 R26 R27 R28 R29 R32 R33 R34 R35 R36 R39 R40: library part CMP-009-00181-1, "Res Thick Film 0603 10K Ohm 1% 1/10W ±100ppm/°C Molded SMD Punched Carrier T/R"
R11 R14: library part CMP-009-00228-1, "Res Thick Film 0603 1.6K Ohm 1% 1/10W +/-100ppm/ßC Molded SMD Punched Carrier T/R", Case Code (Imperial)=0603, Case Code (Metric)=1608, Max Operating Temperature=155°C, Max Power Dissipation=100mW, Min Operating Temperature=-55°C, Package Quantity=1, Resistance Tolerance=1%, Resistor Type="Thick Film", Temperature Coefficient=100ppm/°C, Voltage Rating=75V, Case/Package=0603, Construction=Rectangular, Contact Plating=Tin, Depth=0.8mm, Features="Automotive AEC-Q200", Height=0.022inch, Lead Free="Lead Free", Length=1.6mm, Military Standard=Not, Mounting Technology="Surface Mount", Number of Terminations=2, Packaging="Tape and Reel", Power Rating=100mW, Reach SVHC Compliant=Yes, RoHS Compliant=Yes, Series=ERJ, Termination=SMD/SMT, Tolerance=1%, Voltage Rating (DC)=75V, Width=0.8mm
R17 R42: library part CMP-009-00198-1, "RES SMD 2K OHM 1% 1/8W 0805"
R24 R37: library part CMP-009-00221-1, "RES SMD 150 OHM 1% 1/8W 0805", Case Code (Imperial)=0805, Case Code (Metric)=2012, Max Operating Temperature=155°C, Max Power Dissipation=125mW, Min Operating Temperature=-55°C, Package Quantity=5000, Ratings=AEC-Q200, Resistance Tolerance=1%, Resistor Type="Thick Film", Temperature Coefficient=100ppm/°C, Voltage Rating=150V, Case/Package=0805, Construction=Rectangular, Contact Plating=Tin, Depth=1.25mm, Features="Automotive AEC-Q200", Height=0.6mm, Lead Free="Lead Free", Length=2mm, Military Standard=Not, Mounting Technology="Surface Mount", Number of Terminations=2, Packaging="Tape and Reel", Pins=2, Power Rating=125mW, Radiation Hardening=No, Reach SVHC Compliant=Yes, RoHS Compliant=Yes, Series=ERJ, Technology="THICK FILM", Termination=SMD/SMT, Tolerance=1%, Voltage Rating (DC)=150V, Width=1.2mm, Working Voltage=150V
R41: library part CMP-009-00219-2, "Res SMD 430 Ohm 0.1% 1/5W 0603", Case Code (Imperial)=0603, Case Code (Metric)=1608, Max Operating Temperature=155°C, Max Power Dissipation=200mW, Min Operating Temperature=-55°C, Ratings=AEC-Q200, Resistor Type="Thick Film", Temperature Coefficient=50ppm/°C, Tolerance=0.1%, Availability=Unavailable, Case/Package=0603, Design Item ID=ERJ-PB3B4300V, Features="Automotive AEC-Q200", Height - Seated (Max)=0.022inch, Length=0.063inch, MF="{'manufacturer': u'Panasonic'}", MP=ERJ-PB3B4300V, Number of Terminations=2, Packaging="Cut Tape", Price=None, Series=ERJ, Source=ERJ-PB3B4300V.SchLib, Width=0.032inch
U1: library part CMP-484-000000-3, "RT1062 Teensy 4.0 i.MX ARMÂ® CortexÂ®-M7 MPU Embedded Evaluation Board", Package=None, Availability=Unavailable, Design Item ID=DEV-15583, MF="{'manufacturer': u'SparkFun Electronics'}", MP=DEV-15583, Price=None, Source=DEV-15583.SchLib
U2: library part CMP-015-00010-1, "I2C/SMBus Interface 100kHz/400kHz 3.6V 8-Pin XQFN T/R", Clock Frequency=1MHz, Frequency=100kHz, Max Operating Temperature=85°C, Min Operating Temperature=-40°C, Operating Supply Current=6.5uA, Operating Supply Voltage=3.6V, Output Current=25mA, Package Quantity=1, Contact Plating=Gold, Interface=I2C,SMBus,Serial, Lead Free="Lead Free", Mounting Technology="Surface Mount", Number of I/Os=4, Output Type=PUSH-PULL, Packaging="Tape and Reel", Pins=8, RoHS Compliant=Yes, Series=-
U3 U4 U5: library part CMP-010-00026-1, "Temp Sensor Digital Serial (2-Wire, I2C, SMBus) Automotive 8-Pin HWSON EP T/R", Case/Package=SON, Max Operating Temperature=125°C, Max Output current=200uA, Max Supply Voltage=5.5V, Min Operating Temperature=-55°C, Min Supply Voltage=2.7V, Nominal Supply Current=125µA, Package Quantity=1, Supply Current=125uA, Interface=I2C,Serial,2-Wire, Lead Free="Lead Free", Output Type=I2C,Digital, Packaging="Tape and Reel", Pins=8, Radiation Hardening=No, Reach SVHC Compliant=Yes, Resolution=11b, RoHS Compliant=Yes, Series=PCT2076
U6: library part CMP-010-00025-3, "MAX31865 Series 3.3 V RTD-to-Digital Converter - SSOP-20", Case/Package=SSOP, Max Operating Temperature=125°C, Min Operating Temperature=-40°C, Mounting Technology="Surface Mount", Output Type=SPI, Packaging=Rail/Tube, RoHS Compliant=Yes, Series=-

## Via types
v1: diameter 19.68, hole 7.87, Top Layer to Bottom Layer, 12 vias

## Nets (pads, with @x,y where several pads share a name; then routed paths per layer and width w, separated by ;. In a path a pad name is that pad's centre, name@x,y a point inside that pad or via, vN(x,y) a via of type N, cw(c..) or ccw(c..) an arc to the next point about the centre after c; other vN are vias at no path point)
3.3V: B1.5 B4.1 C1.1 C6.1 C7.1 K1.3 LED_DRIVER.28 LV_33.1 R1.1 R11.2 R14.2 R25.2 R30.1 R31.2 R38.1 R39.2 R40.2 U1.3.3V U2.8 U3.7 U3.8 U4.5 U4.8 U5.6 U5.8 U6.2 U6.3
5V: 5V.2 C2.1 ILI9341.1 LEDs.B2 LEDs.B4 LEDs.B6 LEDs.B8 LV_33.4 PANEL.A4 PANEL.B2 PANEL.B7 R9.1 R12.1 R24.2 R37.2
5V_12: B4.8 C4.1 PS1.3
12: 12V.2 C3.1 J1.2 K2.4 K3.4 PS1.1 R17.1
BTN_NOM: B1.4 R19.1
FAN_PWM: B4.2 R16.1
FAN_TACH: B4.3 R15.1
GND: 5V.1 B1.2 B2.2 B3.2 B4.4 C1.2 C2.2 C6.2 C7.2 ILI9341.2 LED_DRIVER.2 LED_DRIVER.3 LED_DRIVER.4 LED_DRIVER.10 LED_DRIVER.19 LED_DRIVER.24 LED_DRIVER.29 LV_33.7 R6.2 R18.1 R23.1 R26.1 R27.2 R28.1 R29.1 R32.2 R33.2 R34.1 R35.1 R36.1 R42.1 U1.GND U2.4 U3.4 U3.5 U3.6 U3.9 U4.4 U4.6 U4.7 U4.9 U5.4 U5.5 U5.7 U5.9 U6.13 U6.18 U6.19
  other v1: 6142.9,1864.16 6182.27,1864.16 6142.9,1903.53 6182.27,1903.53 6832.13,1912.46 6871.5,1912.46 6832.13,1951.83 6871.5,1951.83 6433.12,2048.94 6472.49,2048.94 6433.12,2088.31 6472.49,2088.31
GND_12: 12V.1 B4.5 C3.2 C4.2 J1.1 K1.2 PR_0.1 PR_1.1 PS1.2
I2C_SCL: I2C_DISCONNECT.1 LED_DRIVER.26 R11.1 U1.19 U2.6
I2C_SCL_P: I2C_DISCONNECT.2 U3.2 U4.2 U5.2
I2C_SDA: I2C_DISCONNECT.3 LED_DRIVER.27 R14.1 U1.18 U2.7
I2C_SDA_P: I2C_DISCONNECT.4 U3.1 U4.1 U5.1
LED_B_0: LED_DRIVER.8 LEDs.A2
LED_B_1: LED_DRIVER.12 LEDs.A4
LED_B_2: LED_DRIVER.15 LEDs.A6
LED_B_3: LED_DRIVER.18 LEDs.A8
LED_G_0: LED_DRIVER.6 LEDs.A1
LED_G_1: LED_DRIVER.9 LEDs.A3
LED_G_2: LED_DRIVER.14 LEDs.A5
LED_G_3: LED_DRIVER.16 LEDs.A7
LED_R_0: LED_DRIVER.7 LEDs.B1
LED_R_1: LED_DRIVER.11 LEDs.B3
LED_R_2: LED_DRIVER.13 LEDs.B5
LED_R_3: LED_DRIVER.17 LEDs.B7
LV_12_STATUS: K1.4 R18.2 R20.1
LV_33_MODE: LV_33.6 R9.2 R22.1
MAX_CS: U1.20 U6.16
MAX_DRDY: U1.16 U6.1
MAX_SCLK: U1.21 U6.15
MAX_SDI: U1.22 U6.14
MAX_SDO: U1.17 U6.17
NetB2_3: B2.3 K2.2
NetB3_3: B3.3 K3.2
NetB4_6: B4.6 J1.3
NetB4_7: B4.7 J1.4
NetBlue_1: Blue.1 C5.1 U6.11 U6.12
NetC5_2: C5.2 Red+.1 U6.10
NetK1_1: K1.1 R17.2
NetK2_1: K2.1 R24.1
NetK2_3: K2.3 PR_0.2
NetK3_1: K3.1 R37.1
NetK3_3: K3.3 PR_1.2
NetL1_1: L1.1 LV_33.3
NetL1_2: L1.2 LV_33.2
NetLED_DRIVER_1: LED_DRIVER.1 R42.2
NetLED_DRIVER_5: LED_DRIVER.5 R39.1
NetLED_DRIVER_25: LED_DRIVER.25 R40.1
NetLV_33_5: LV_33.5 R12.2
NetLV_33_8: LV_33.8 R1.2 R6.1
NetPANEL_A1: PANEL.A1 R38.2
NetPANEL_A6: PANEL.A6 R30.2
NetPANEL_B5: PANEL.B5 R31.1
NetPANEL_B9: PANEL.B9 R25.1
NetR2_1: R2.1 U1.0
NetR3_1: R3.1 U1.1
NetR4_2: R4.2 U1.23
NetR5_1: R5.1 U1.2
NetR7_1: R7.1 U1.3
NetR8_1: R8.1 U1.4
NetR10_1: R10.1 U1.5
NetR13_1: R13.1 U1.6
NetR15_2: R15.2 U1.15
NetR16_2: R16.2 U1.14
NetR19_2: R19.2 U2.1
NetR20_2: R20.2 U2.2
NetR21_2: R21.2 U2.3
NetR22_2: R22.2 U2.5
NetR41_1: R41.1 U6.4 U6.5
NetR41_2: R41.2 U6.6 U6.7
NetRed-_1: Red-.1 U6.8 U6.9
PANEL_BTN_0: PANEL.A2 R8.2 R36.2
PANEL_BTN_1: PANEL.B4 R7.2 R32.1
PANEL_BTN_2: PANEL.A7 R5.2 R29.2
PANEL_LED_0: LED_DRIVER.20 PANEL.B1
PANEL_LED_1: LED_DRIVER.21 PANEL.A5
PANEL_LED_2: LED_DRIVER.22 PANEL.B6
PANEL_NC_0: PANEL.A3 R34.2
PANEL_NC_1: B1.6 PANEL.B3 R33.1
PANEL_NC_2: PANEL.A8 R28.2
PANEL_RCKR_0: PANEL.A9 R13.2 R26.2
PANEL_RCKR_1: PANEL.B8 R10.2 R27.1
PR_0: B2.1 R3.2 R23.2
PR_1: B3.1 R2.2 R35.2
TFT_CLK: ILI9341.7 ILI9341.10 U1.13
TFT_CS: ILI9341.3 U1.9
TFT_DC: ILI9341.5 U1.10
TFT_DO: ILI9341.9 ILI9341.13 U1.12
TFT_IQR: ILI9341.14 U1.7
TFT_LED: ILI9341.8 R4.1
TFT_RST: ILI9341.4 R21.1
TFT_SDI: ILI9341.6 ILI9341.12 U1.11
TFT_T_CS: ILI9341.11 U1.8
pads on no net: 5V.3 5V.4 12V.3 12V.4 B1.1 B1.3 J1. LED_DRIVER.23 PR_0.3 PR_0.4 PR_1.3 PR_1.4 U1.ON-OFF U1.PGM U1.VBAT U1.VIN U3.3 U4.3 U5.3 U6.20

## Text inside footprints (layer, text, board x,y; h text height)
ILI9341: Bottom Overlay "14" at 4526.23,2922.81 h40 r270; Bottom Overlay "13" at 4626.23,2922.81 h40 r270; Bottom Overlay "2" at 4526.23,3691.31 h40 r270; Bottom Overlay "1" at 4626.23,3695.25 h40 r270